# Altium PCB carrier.PcbDoc
Units mm, origin at the board's own origin, x right, y up, seen from the top; angles counter-clockwise.
Board outline 130.2 x 79.8 mm, 2 copper layers (Top Layer, Bottom Layer); 22 components, 20 nets, 149 pads, 9 vias.
Unrouted connection lines stored in the file: 1.
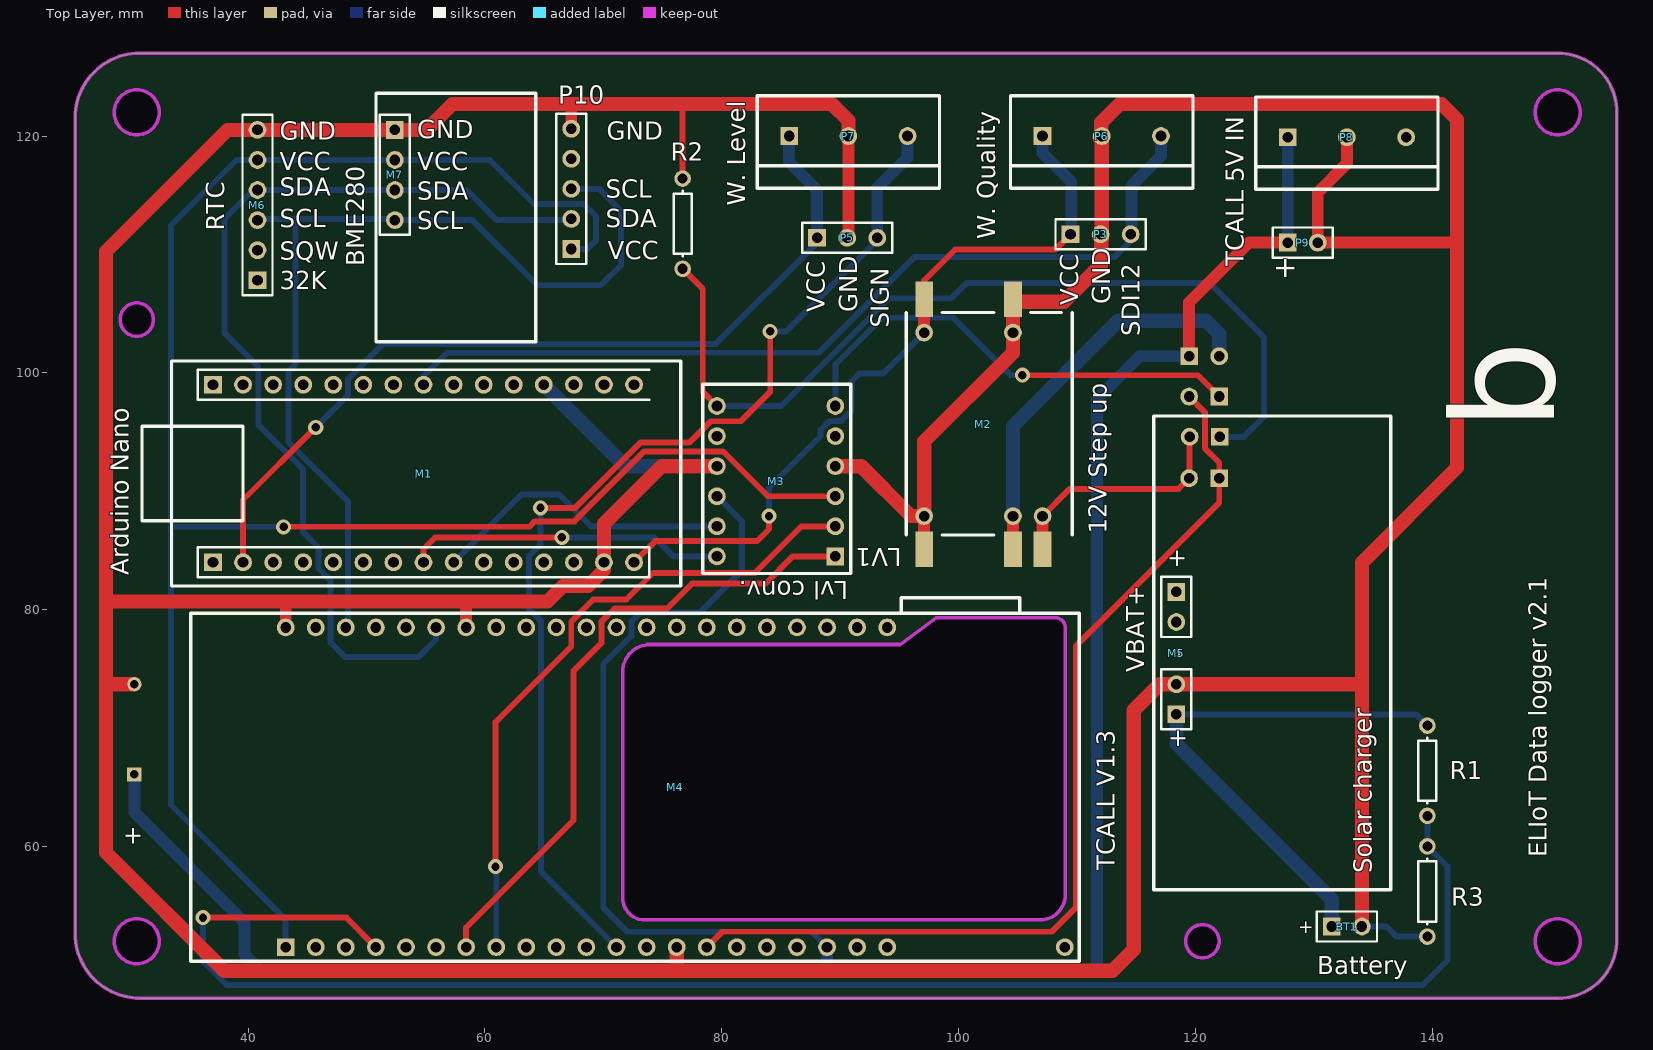
[diagram p0: Top Layer view]
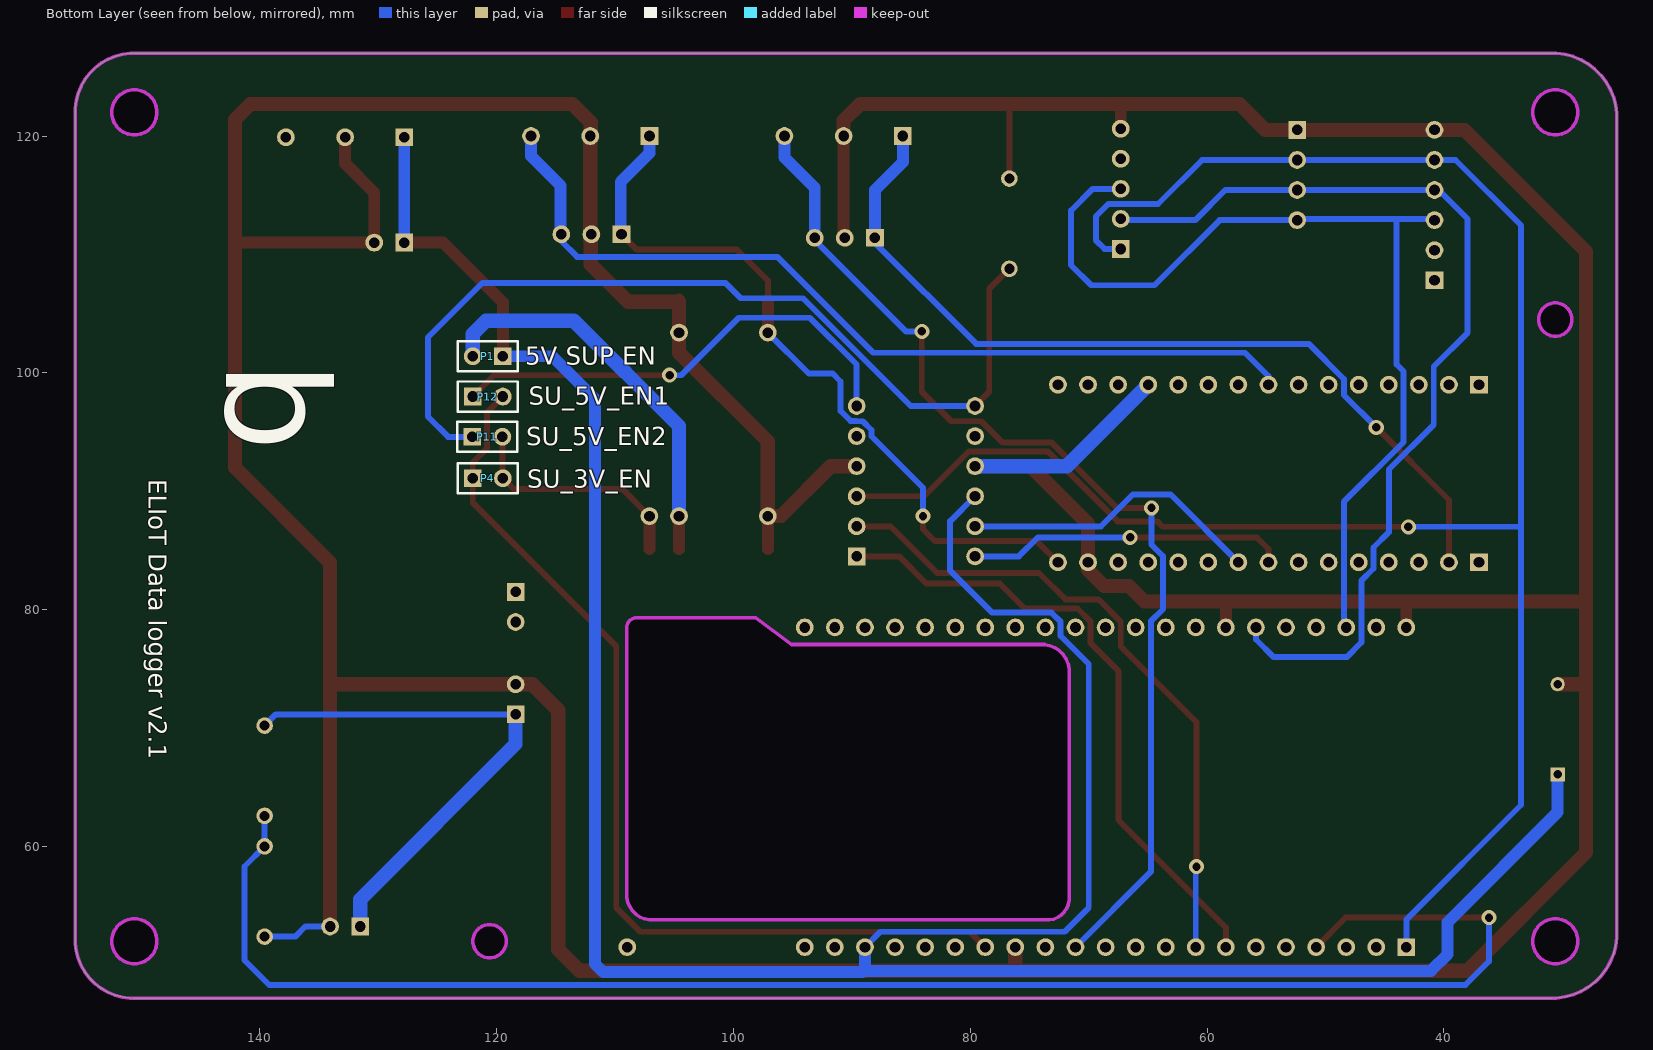
[diagram p1: Bottom Layer view, seen from below]

## Layer stack, top to bottom
Top Solder: solder mask 0.0102, Solder Resist, Dk 3.5
Top Layer: signal copper 0.0356
Dielectric 1: dielectric 0.32, FR-4, Dk 4.8
Bottom Layer: signal copper 0.0356
Bottom Solder: solder mask 0.0102, Solder Resist, Dk 3.5

## Board outline
25.4,52.658 25.4,121.537 cw(c30.863,121.537) 30.863,127 150.6,127 cw(c150.6,122) 155.6,122 155.6,52.14 cw(c150.66,52.14) 150.66,47.2 30.858,47.2 cw(c30.858,52.658)
cut-out: 119.197,52 ccw(c120.6,52) 120.6,50.597 ccw(c120.6,52) 122.003,52 ccw(c120.6,52) 120.6,53.403 ccw(c120.6,52)
cut-out: 73.5,53.8 106.9,53.8 ccw(c106.9,55.9) 109,55.9 109,78.5 ccw(c108.2,78.5) 108.2,79.3 98.104,79.3 95.097,77.057 73.957,77.057 ccw(c73.957,74.76) 71.66,74.76 71.66,55.64 ccw(c73.5,55.64)
cut-out: 30.6,103.097 cw(c30.6,104.5) 29.197,104.5 cw(c30.6,104.5) 30.6,105.903 cw(c30.6,104.5) 32.003,104.5 cw(c30.6,104.5)
cut-out: 30.6,120.1 cw(c30.6,122) 28.7,122 cw(c30.6,122) 30.6,123.9 cw(c30.6,122) 32.5,122 cw(c30.6,122)
cut-out: 28.7,52 cw(c30.6,52) 30.6,53.9 cw(c30.6,52) 32.5,52 cw(c30.6,52) 30.6,50.1 cw(c30.6,52)
cut-out: 148.7,122 ccw(c150.6,122) 150.6,120.1 ccw(c150.6,122) 152.5,122 ccw(c150.6,122) 150.6,123.9 ccw(c150.6,122)
cut-out: 148.7,52 cw(c150.6,52) 150.6,53.9 cw(c150.6,52) 152.5,52 cw(c150.6,52) 150.6,50.1 cw(c150.6,52)

## Design rules (kind name [scope] priority, off if disabled: settings)
Clearance [All] p1: gap=0.254 ignorepadtopadclearanceinfootprint=FALSE except(0: Arc-Hole Track-Hole SMDPad-Hole THPad-Hole Via-Hole Fill-Hole Poly-Hole Region-Hole Text-Hole)
PolygonConnect [All] p1: connectstyle=Relief reliefconductorwidth=0.254 reliefentries=4 polygonreliefangle="90 Angle" airgapwidth=0.254
RoutingVias [All] p1: holewidth=0.711 width=1.27 viastyle="Through Hole" minholewidth=0.711 minwidth=1.27 maxholewidth=0.711 maxwidth=1.27
SolderMaskExpansion [All] p1: expansion=0.102
Width [All] p1: maxlimit=4 minlimit=0.3 preferedwidth=1 minimp=50.000000 maximp=50.000000 favimp=50.000000
30 further rules are at their usual default settings.

## Components (designator, comment, footprint, x,y, rotation, side; value= is the part's Value field where it differs from the comment)
BT1 "Battery" BAT-2 132.8,53.243 r0 top
M1 "Arduino Nano" "ARDUINO NANO" 37.04,84 r90 top locked
M2 "Generic 3.3V - 12V Step up converter" "GENERIC 3.3 - 12V STEP UP" 96.8,87.5 r90 top locked
M3 "Generic Level Converter 4CH" "GENERIC LEVEL CONVERTER" 89.6,84.5 r180 top
M4 "TCall 1.3" "TCALL V1.3" 43.18,51.5 r90 top locked
M5 "Generic Solar Charger v1.0" "GENERIC SOLAR CHARGER" 116.4,56.36 r90 top
M6 "RTC" "GENERIC RTC MODULE" 40.8,107.82 r90 top
M7 "BME280" "SPARKFUN BME280 MODULE" 52.4,112.92 r90 top locked
P1 "5V SUP EN" HDR1X2 119.48,101.4 r0 bottom
P3 "Water Quality Header" HDR1X3 109.46,111.7 r0 top
P4 "SU_3V_EN" HDR1X2 122.02,91.1 r180 bottom
P5 "Water Level Header" HDR1X3 88.06,111.4 r0 top
P6 "Water Quality Screw Terminal" "TERMINAL BLOCK 3W 5MM" 107.1,120 r0 top
P7 "Water Level Screw Terminal" "TERMINAL BLOCK 3W 5MM" 85.7,120 r0 top
P8 "5V In" "TERMINAL BLOCK 3W 5MM" 127.8,119.9 r0 top
P9 "TCALL 5V IN" HDR1X2 127.8,111 r0 top
P10 "Header 5" HDR1X5 67.3,110.46 r90 top
P11 "SU_5V_EN2" HDR1X2 122.06,94.6 r180 bottom
P12 "SU_5V_EN1" HDR1X2 122.02,98 r180 bottom
R1 "Res1" AXIAL-0.3 139.6,66.4 r90 top value=100K
R2 "Res1" AXIAL-0.3 76.7,112.6 r270 top value=10K
R3 "Res1" AXIAL-0.3 139.6,56.2 r90 top value=100K

## Footprints (in the part's own frame and the unit in brackets; to place one, negate y for a bottom-side part, rotate by r counter-clockwise, add the part's x,y. Pads: shape width x height; smd on the part's side, far side on the other; paste and mask are expansions set on the pad)
"ARDUINO NANO" [mm]
  rect 1.5x1.5 hole 0.9: 1(0,0) 30(15,0)
  round 1.5 hole 0.9: 2(0,-2.54) 3(0,-5.08) 4(0,-7.62) 5(0,-10.16) 6(0,-12.7) 7(0,-15.24) 8(0,-17.78) 9(0,-20.32) 10(0,-22.86) 11(0,-25.4) 12(0,-27.94) 13(0,-30.48) 14(0,-33.02) 15(0,-35.56) 16(15,-35.56) 17(15,-33.02) 18(15,-30.48) 19(15,-27.94) 20(15,-25.4) 21(15,-22.86) 22(15,-20.32) 23(15,-17.78) 24(15,-15.24) 25(15,-12.7) 26(15,-10.16) 27(15,-7.62) 28(15,-5.08) 29(15,-2.54)
  silkscreen extent -2,-39.5 17,6
AXIAL-0.3 [mm] "Axial Device, Thru-Hole; 2 Leads; 0.3 in Pin Spacing"
  round 1.4 hole 0.85: 1(-3.81,0) 2(3.81,0)
  silkscreen extent -2.77,-0.76 2.77,0.76
BAT-2 [mm] "Battery; 2 Leads"
  rect 1.5x1.5 hole 0.9: 1(-1.27,0)
  round 1.5 hole 0.9: 2(1.27,0)
  silkscreen extent -2.54,-1.27 2.54,1.27
"GENERIC 3.3 - 12V STEP UP" [mm]
  rect 3x1.5 smd: 1(-2.4,-0.3) 2(-2.4,-7.8) 3(-2.4,-10.3) 4(18.7,-7.8) 5(18.7,-0.3)
  round 1.5 hole 0.9: 1(0.4,-0.3) 2(0.4,-7.8) 3(0.4,-10.3) 4(15.9,-7.8) 5(15.9,-0.3)
  Top Layer lines w1: -2.4,-0.3 0.4,-0.3 ; 15.9,-0.3 18.5,-0.3 18.7,-0.3 ; -2.4,-7.8 0.4,-7.8 ; 15.9,-7.8 18.5,-7.8 18.7,-7.8 ; -2.4,-10.3 0.4,-10.3
  silkscreen extent -1.2,-12.8 17.6,1.2
"GENERIC LEVEL CONVERTER" [mm]
  rect 1.5x1.5 hole 0.9: 1(0,0)
  round 1.5 hole 0.9: 2(0,-2.54) 3(0,-5.08) 4(0,-7.62) 5(0,-10.16) 6(0,-12.7) 7(10,-12.7) 8(10,-10.16) 9(10,-7.62) 10(10,-5.08) 11(10,-2.54) 12(10,0)
  silkscreen extent -1.3,-14.55 11.2,1.45
"GENERIC RTC MODULE" [mm]
  rect 1.5x1.5 hole 0.9: 1(0,0)
  round 1.5 hole 0.9: 2(2.54,0) 3(5.08,0) 4(7.62,0) 5(10.16,0) 6(12.7,0)
  silkscreen extent -1.27,-1.27 13.97,1.27
"GENERIC SOLAR CHARGER" [mm]
  rect 1.5x1.5 hole 0.9: 1(14.8,-2) 4(25.14,-2)
  round 1.5 hole 0.9: 2(17.34,-2) 3(22.6,-2)
  silkscreen extent 0,-20.1 40,-0.1
HDR1X2 [mm] "Connector; Header; 2 Position"
  rect 1.5x1.5 hole 0.9: 1(0,0)
  round 1.5 hole 0.9: 2(2.54,0)
  silkscreen extent -1.27,-1.27 3.81,1.27
HDR1X3 [mm]
  rect 1.5x1.5 hole 0.9: 1(0,0)
  round 1.5 hole 0.9: 2(2.54,0) 3(5.08,0)
  silkscreen extent -1.27,-1.27 6.35,1.27
HDR1X5 [mm] "Connector; Header; 5 Position"
  rect 1.5x1.5 hole 0.9: 1(0,0)
  round 1.5 hole 0.9: 2(2.54,0) 3(5.08,0) 4(7.62,0) 5(10.16,0)
  silkscreen extent -1.27,-1.27 11.43,1.27
"SPARKFUN BME280 MODULE" [mm]
  rect 1.5x1.5 hole 0.9: 1(7.6,0)
  round 1.5 hole 0.9: 2(5.06,0) 3(2.52,0) 4(-0.02,0)
  silkscreen extent -10.3,-11.9 10.7,1.6
"TCALL V1.3" [mm]
  rect 1.5x1.5 hole 0.9: 1(0,0)
  round 1.5 hole 0.9: 2(0,-2.54) 3(0,-5.08) 4(0,-7.62) 5(0,-10.16) 6(0,-12.7) 7(0,-15.24) 8(0,-17.78) 9(0,-20.32) 10(0,-22.86) 11(0,-25.4) 12(0,-27.94) 13(0,-30.48) 14(0,-33.02) 15(0,-35.56) 16(0,-38.1) 17(0,-40.64) 18(0,-43.18) 19(0,-45.72) 20(0,-48.26) 21(0,-50.8) 22(27,-50.8) 23(27,-48.26) 24(27,-45.72) 25(27,-43.18) 26(27,-40.64) 27(27,-38.1) 28(27,-35.56) 29(27,-33.02) 30(27,-30.48) 31(27,-27.94) 32(27,-25.4) 33(27,-22.86) 34(27,-20.32) 35(27,-17.78) 36(27,-15.24) 37(27,-12.7) 38(27,-10.16) 39(27,-7.62) 40(27,-5.08) 41(27,-2.54) 42(27,0) VBAT(0,-65.8)
  silkscreen extent -1.2,-67 29.5,8
"TERMINAL BLOCK 3W 5MM" [mm]
  rect 1.5x1.5 hole 0.9: 1(0,0)
  round 1.5 hole 0.9: 2(5,0) 3(10,0)
  silkscreen extent -2.7,-4.4 12.7,3.4

## Part data
BT1: "Multicell Battery", LatestRevisionDate=17-Jul-2002, LatestRevisionNote="Re-released for DXP Platform.", PackageDescription="Battery; 2 Leads", PackageReference=BAT-2, Published=24-Mar-1999, Publisher="Altium Limited"
M6: library part "Generic RTC Module"
M7: library part "Sparkfun BME280 Module"
P1 P4 P9 P11 P12: library part "Header 2", "Header, 2-Pin", LatestRevisionDate=17-Jul-2002, LatestRevisionNote="Re-released for DXP Platform.", Publisher="Altium Limited"
P3: library part "Header 3", "Water Ql.", LatestRevisionDate=17-Jul-2002, LatestRevisionNote="Re-released for DXP Platform.", Publisher="Altium Limited"
P5 P6 P7 P8: library part "Header 3", "Header, 3-Pin", LatestRevisionDate=17-Jul-2002, LatestRevisionNote="Re-released for DXP Platform.", Publisher="Altium Limited"
P10: "Header, 5-Pin", LatestRevisionDate=17-Jul-2002, LatestRevisionNote="Re-released for DXP Platform.", Publisher="Altium Limited"
R1 R2 R3: "Resistor", LatestRevisionDate=17-Jul-2002, LatestRevisionNote="Re-released for DXP Platform.", PackageDescription="Axial Device, Thru-Hole; 2 Leads; 0.3 in Pin Spacing", PackageReference=AXIAL-0.3, Published=8-Jun-2000, Publisher="Altium Limited"

## Free pads (board coordinates)
  rect 1.2x1.2 hole 0.7: 1(30.4,66.09)
  round 1.2 hole 0.7: 2(30.4,73.71)

## Via types
v1: diameter 1.27, hole 0.711, Top Layer to Bottom Layer, 9 vias

## Nets (pads, with @x,y where several pads share a name; then routed paths per layer and width w, separated by ;. In a path a pad name is that pad's centre, name@x,y a point inside that pad or via, vN(x,y) a via of type N, cw(c..) or ccw(c..) an arc to the next point about the centre after c; other vN are vias at no path point)
GND: BT1.2 M1.14 M1.19 M2.1 M2.4 M3.4 M3.9 M4.14 M4.36 M4.42 M5.2 M6.6 M7.1 P3.2 P5.2 P6.2 P7.2 P8.2 P9.2 P10.5 pad.2 R2.1 R3.1 | length 536.3
  Top Layer w0.5: R2.1 76.7,122.7 ; 134.07,74.4 134.2,74.27
  Top Layer w1: M4.42 43.18,80.67 43.21,80.7 ; M4.36 58.42,80.7 ; P10.5@67.1,120.58 67.3,120.78 67.3,122.7 ; P5.2 90.7,111.5 P7.2@90.7,119.9 ; P7.2@90.7,120.3 90.8,120.2 P7.2@90.8,119.9 ; P8.2 132.8,117.68 130.34,115.22 P9.2 142.1,111
  Top Layer w1.2: 28,96.6 28,80.7 ; 28,96.7 28,110.245 38.275,120.52 M6.6 55.1,120.52 57.28,122.7 67.3,122.7 76.7,122.7 89.3,122.7 90.7,121.3 P7.2@90.7,120.3 ; pad.2 28.01,73.71 28,73.7 ; M4.14 76.2,49.6 76.1,49.5 ; M3.9 74.92,92.12 70.06,87.26 70.06,83.36 68.7,82 66.6,82 65.3,80.7 58.42,80.7 43.21,80.7 28,80.7 ; M3.4 91.78,92.12 96,87.9 97.1,87.9 97.1,94.206 104.6,101.706 104.6,103.4 104.6,106 108.9,106 112.06,109.16 112.06,111.2 112.1,111.24 P6.2@112.1,119.9 ; P6.2@111.9,119.9 112.06,120.06 112.06,121.14 113.62,122.7 140.8,122.7 142.1,121.4 142.1,111 142.1,92 134.07,83.97 134.07,74.4 134.07,73.7 ; BT1.2 134.07,73.7 ; 28,73.7 28,80.7 ; 28,73.7 28,59.5 38,49.5 76.1,49.5 ; 76.1,49.5 113,49.5 114.8,51.3 114.8,71.5 117,73.7 M5.2 134.07,73.7
  Bottom Layer w0.5: BT1.2 136.157,53.243 137.01,52.39 R3.1
  Bottom Layer w1.2: M1.19 71.86,92.12 M3.9
"MAIN I2C SCL": M4.40 M6.3 M7.4 P10.3 | length 80.2
  Bottom Layer w0.5: M6.3 40.9,113 44,113 ; M4.40 48.454,78.694 48.454,89.106 43.406,94.154 43.406,100.113 44,100.707 44,113 ; P10.3 69.66,115.54 71.5,113.7 71.5,109.1 69.8,107.4 64.44,107.4 58.94,112.9 M7.4 52.3,113 44,113
"MAIN I2C SDA": M4.37 M6.4 M7.3 P10.2 | length 81.9
  Bottom Layer w0.5: M4.37 55.88,77.48 54.388,75.988 48.212,75.988 46.974,77.226 46.974,82.453 45.946,83.481 45.946,85.254 44.66,86.54 44.66,91.834 40.866,95.628 40.866,100.534 38,103.4 38,113 40.44,115.44 M6.4 58.46,115.44 61,112.9 P10.2@67.3,112.9
NetBT1_1: BT1.1 M4.VBAT M5.1 R1.2 | length 44.9
  Bottom Layer w0.5: M5.1 138.65,71.16 R1.2
  Bottom Layer w1.2: M5.1 118.4,68.651 131.53,55.521 BT1.1
NetM1_2: M1.2 P5.1 P7.1 | length 73
  Top Layer w0.5: M1.2 39.58,89.26 v1(45.72,95.4)
  Bottom Layer w0.5: v1(45.72,95.4) 48.454,98.134 48.454,99.487 51.421,102.454 79.514,102.454 P5.1@88.06,111
  Bottom Layer w1: P7.1@85.7,119.9 85.7,117.8 88.06,115.44 P5.1
NetM1_8: M1.8 M3.12 | length 27
  Top Layer w0.5: M1.8 54.82,85.12 55.8,86.1 v1(66.5,86.1)
  Bottom Layer w0.5: v1(66.5,86.1) 74.3,86.1 75.9,84.5 M3.12
NetM1_9: M1.9 M3.11 | length 25.7
  Bottom Layer w0.5: M1.9 63.099,89.739 66.261,89.739 68.96,87.04 M3.11
NetM1_15: M1.15 M2.5 P3.1 P6.1 | length 63.9
  Top Layer w0.5: M1.15 74.386,85.786 82.986,85.786 84,86.8 v1(84,87.9) ; M2.5@97.1,103.4 97.1,106 97.1,106.2 97.1,107.8 99.7,110.4 108.16,110.4 108.96,111.2 P3.1@109.52,111.2
  Bottom Layer w0.5: v1(84,87.9) 84,90.3 88.346,94.646 88.346,95.179 89.081,95.914 89.614,95.914 89.646,95.946 90.119,95.946 90.961,96.788 90.961,99.272 91.628,99.939 93.639,99.939 M2.5@97.1,103.4
  Bottom Layer w1: P6.1@107.1,119.9 107.1,118.54 109.52,116.12 P3.1@109.52,111.6
NetM1_23: M1.23 P3.3 P6.3 | length 75
  Bottom Layer w0.5: M1.23 54.82,99.72 56.8,101.7 88.2,101.7 96.3,109.8 113.2,109.8 114.54,111.14 P3.3@114.54,111.6
  Bottom Layer w1: P3.3@114.54,111.6 114.6,111.66 114.6,115.8 117.1,118.3 P6.3@117.1,119.9
NetM2_3: M2.3 P4.2 P11.2 | length 17.2
  Top Layer w0.5: M2.3@107.1,87.9 109.4,90.2 118.58,90.2 P4.2 119.52,91.14 P11.2
NetM3_1: M3.1 M4.7 | length 54.3
  Top Layer w0.5: M4.7 58.42,53.163 67.5,62.243 67.5,74.834 69.866,77.2 69.866,79.019 70.947,80.1 75.4,80.1 77.5,82.2 83.7,82.2 86,84.5 M3.1
NetM3_2: M3.2 M4.8 | length 55.8
  Top Layer w0.5: v1(60.9,58.3) 60.9,70.5 67.294,76.894 67.294,78.987 69.161,80.854 71.954,80.854 74.2,83.1 82.8,83.1 86.74,87.04 M3.2
  Bottom Layer w0.5: v1(60.9,58.3) 60.96,58.24 M4.8
NetM3_6: M3.6 P12.1 | length 40.3
  Top Layer w0.5: v1(105.4,99.8) 120.22,99.8 P12.1
  Bottom Layer w0.5: M3.6 89.6,100.7 93.554,104.654 99.546,104.654 104.4,99.8 v1(105.4,99.8)
NetM3_7: M3.7 P11.1 R2.2 | length 76.3
  Top Layer w0.5: R2.2 78.4,107.09 78.4,98.4 M3.7
  Bottom Layer w0.5: M3.7 85.034,97.2 94.134,106.3 99.4,106.3 100.7,107.6 121.2,107.6 125.8,103 125.8,96.3 124.1,94.6 P11.1
NetM4_4: M4.4 R1.1 R3.2 | length 139
  Top Layer w0.5: v1(36.2,54) 48.3,54 M4.4
  Bottom Layer w0.5: v1(36.2,54) 36.2,50.3 38.2,48.3 139.2,48.3 141.3,50.4 141.3,58.31 R3.2 R1.1
NetM4_12: M4.12 P5.3 P7.3 | length 90.8
  Top Layer w0.5: v1(64.7,88.6) 67.634,88.6 73.162,94.128 77.295,94.128 79.081,95.914 81.614,95.914 84.1,98.4 v1(84.1,103.5)
  Bottom Layer w0.5: v1(64.7,88.6) 64.7,85.493 63.726,84.519 63.726,80.047 64.754,79.019 64.754,57.866 M4.12 ; v1(84.1,103.5) 85.44,103.5 P5.3@92.94,111
  Bottom Layer w1: P5.3@93.14,111.2 P5.3 93.14,115.64 95.7,118.2 P7.3@95.7,119.9
NetM4_15: M4.15 P4.1 P12.2 | length 81.8
  Top Layer w0.5: M4.15 80.04,52.8 107.866,52.8 109.9,54.834 109.9,76.9 122.02,89.02 P4.1 122.02,92.427 120.806,93.641 120.806,96.674 P12.2
TANTALUM_4V: M2.2 P1.2 | length 31.1
  Bottom Layer w1.2: M2.2@104.6,87.9 104.6,95.5 113.5,104.4 120.9,104.4 122.02,103.28 P1.2
"TCALL 3.3V": M3.3 M4.1 M6.5 M7.2 P10.1 | length 169.9
  Top Layer w0.5: v1(43,87) 63.767,87 64.228,87.461 67.561,87.461 73.474,93.374 80.119,93.374 83.913,89.58 M3.3
  Bottom Layer w0.5: v1(43,87) 33.7,87 33.5,86.8 ; M4.1 43.18,53.82 33.5,63.5 33.5,86.8 ; P10.1 68.66,110.46 69.4,111.2 69.4,113.2 68.346,114.254 64.146,114.254 60.42,117.98 M7.2 39.02,117.98 33.5,112.46 33.5,86.8
"TCALL 5V": M3.10 M4.19 P1.1 P8.1 P9.1 pad.1 | length 238.4
  Top Layer w1: P1.1 119.48,105.96 124.52,111 P9.1
  Bottom Layer w0.5: M3.10 81.7,87.48 81.7,83.3 78.154,79.754 73.141,79.754 72.374,78.987 72.374,77.783 70,75.409 70,54.839 72.039,52.8 87.6,52.8 M4.19
  Bottom Layer w1: pad.1@30.413,66 30.413,62.887 39.7,53.6 39.7,50.9 41.1,49.5 89,49.5 ; M4.19 88.9,49.6 89,49.5 ; P1.1 115.3,101.4 111.7,97.8 111.7,57.7 111.7,50.1 111,49.4 89.1,49.4 89,49.5 ; P9.1 P8.1
pads on no net: M1.1 M1.3 M1.4 M1.5 M1.6 M1.7 M1.10 M1.11 M1.12 M1.13 M1.16 M1.17 M1.18 M1.20 M1.21 M1.22 M1.24 M1.25 M1.26 M1.27 M1.28 M1.29 M1.30 M3.5 M3.8 M4.2 M4.3 M4.5 M4.6 M4.9 M4.10 M4.11 M4.13 M4.16 M4.17 M4.18 M4.20 M4.21 M4.22 M4.23 M4.24 M4.25 M4.26 M4.27 M4.28 M4.29 M4.30 M4.31 M4.32 M4.33 M4.34 M4.35 M4.38 M4.39 M4.41 M5.3 M5.4 M6.1 M6.2 P8.3 P10.4

## Keep-outs
Keep-Out Layer:
  lines w0.3: 71.66,74.76 71.66,55.64 71.66,55.459 71.731,55.103 71.869,54.768 72.071,54.467 72.327,54.211 72.628,54.009 72.963,53.871 73.319,53.8 73.5,53.8 ; 71.66,74.76 71.66,74.986 71.748,75.43 71.921,75.848 72.173,76.224 72.493,76.544 72.869,76.796 73.287,76.969 73.731,77.057 73.957,77.057 95.097,77.057 98.104,79.3 108.2,79.3 ; 71.66,74.76 71.66,74.76 ; 71.66,74.76 71.66,74.76 ; 73.5,53.8 106.9,53.8 107.107,53.8 107.513,53.881 107.895,54.039 108.239,54.269 108.531,54.561 108.761,54.905 108.919,55.287 109,55.693 109,55.9 ; 73.5,53.8 73.5,53.8 ; 108.2,79.3 108.2,79.3 ; 108.2,79.3 108.279,79.3 108.433,79.269 108.579,79.209 108.71,79.121 108.821,79.01 108.909,78.879 108.969,78.733 109,78.579 109,78.5 109,55.9 ; 109,55.9 109,55.9 ; 25.4,52.301 25.4,52.658 25.4,121.537 25.4,121.895 25.493,122.605 25.679,123.297 25.953,123.959 26.311,124.579 26.747,125.147 27.253,125.653 27.821,126.089 28.441,126.447 29.103,126.721 29.795,126.907 30.505,127 150.928,127 151.578,126.914 152.211,126.745 152.816,126.494 153.384,126.166 153.904,125.767 154.367,125.304 154.766,124.784 155.094,124.216 155.345,123.611 155.514,122.978 155.6,122.328 155.6,122 155.6,52.14 155.6,51.816 155.515,51.174 155.348,50.548 155.1,49.95 154.776,49.389 154.382,48.876 153.924,48.418 153.411,48.024 152.85,47.7 152.252,47.452 151.626,47.285 150.984,47.2 30.501,47.2 29.791,47.293 29.1,47.479 28.439,47.752 27.819,48.11 27.252,48.546 26.746,49.052 26.31,49.619 25.952,50.239 25.679,50.9 25.493,51.591 25.4,52.301 ; 28.7,51.813 28.773,51.446 28.916,51.1 29.124,50.789 29.389,50.524 29.7,50.316 30.046,50.173 30.413,50.1 30.787,50.1 31.154,50.173 31.5,50.316 31.811,50.524 32.076,50.789 32.284,51.1 32.427,51.446 32.5,51.813 32.5,52 32.5,52.187 32.427,52.554 32.284,52.9 32.076,53.211 31.811,53.476 31.5,53.684 31.154,53.827 30.787,53.9 30.413,53.9 30.046,53.827 29.7,53.684 29.389,53.476 29.124,53.211 28.916,52.9 28.773,52.554 28.7,52.187 28.7,52 28.7,51.813 ; 28.7,121.813 28.773,121.446 28.916,121.1 29.124,120.789 29.389,120.524 29.7,120.316 30.046,120.173 30.413,120.1 30.787,120.1 31.154,120.173 31.5,120.316 31.811,120.524 32.076,120.789 32.284,121.1 32.427,121.446 32.5,121.813 32.5,122 32.5,122.187 32.427,122.554 32.284,122.9 32.076,123.211 31.811,123.476 31.5,123.684 31.154,123.827 30.787,123.9 30.413,123.9 30.046,123.827 29.7,123.684 29.389,123.476 29.124,123.211 28.916,122.9 28.773,122.554 28.7,122.187 28.7,122 28.7,121.813 ; 29.197,104.362 29.251,104.091 29.357,103.835 29.51,103.606 29.706,103.41 29.935,103.257 30.191,103.151 30.462,103.097 30.738,103.097 31.009,103.151 31.265,103.257 31.494,103.41 31.69,103.606 31.843,103.835 31.949,104.091 32.003,104.362 32.003,104.5 32.003,104.638 31.949,104.909 31.843,105.165 31.69,105.394 31.494,105.59 31.265,105.743 31.009,105.849 30.738,105.903 30.462,105.903 30.191,105.849 29.935,105.743 29.706,105.59 29.51,105.394 29.357,105.165 29.251,104.909 29.197,104.638 29.197,104.5 29.197,104.362 ; 119.197,51.862 119.251,51.591 119.357,51.335 119.51,51.106 119.706,50.91 119.935,50.757 120.191,50.651 120.462,50.597 120.738,50.597 121.009,50.651 121.265,50.757 121.494,50.91 121.69,51.106 121.843,51.335 121.949,51.591 122.003,51.862 122.003,52 122.003,52.138 121.949,52.409 121.843,52.665 121.69,52.894 121.494,53.09 121.265,53.243 121.009,53.349 120.738,53.403 120.462,53.403 120.191,53.349 119.935,53.243 119.706,53.09 119.51,52.894 119.357,52.665 119.251,52.409 119.197,52.138 119.197,52 119.197,51.862 ; 148.7,51.813 148.773,51.446 148.916,51.1 149.124,50.789 149.389,50.524 149.7,50.316 150.046,50.173 150.413,50.1 150.787,50.1 151.154,50.173 151.5,50.316 151.811,50.524 152.076,50.789 152.284,51.1 152.427,51.446 152.5,51.813 152.5,52 152.5,52.187 152.427,52.554 152.284,52.9 152.076,53.211 151.811,53.476 151.5,53.684 151.154,53.827 150.787,53.9 150.413,53.9 150.046,53.827 149.7,53.684 149.389,53.476 149.124,53.211 148.916,52.9 148.773,52.554 148.7,52.187 148.7,52 148.7,51.813 ; 148.7,121.813 148.773,121.446 148.916,121.1 149.124,120.789 149.389,120.524 149.7,120.316 150.046,120.173 150.413,120.1 150.787,120.1 151.154,120.173 151.5,120.316 151.811,120.524 152.076,120.789 152.284,121.1 152.427,121.446 152.5,121.813 152.5,122 152.5,122.187 152.427,122.554 152.284,122.9 152.076,123.211 151.811,123.476 151.5,123.684 151.154,123.827 150.787,123.9 150.413,123.9 150.046,123.827 149.7,123.684 149.389,123.476 149.124,123.211 148.916,122.9 148.773,122.554 148.7,122.187 148.7,122 148.7,121.813

## Other copper
Bottom Layer:
  pour cut-out: 148.7,52 cw(c150.6,52) 150.6,53.9 cw(c150.6,52) 152.5,52 cw(c150.6,52) 150.6,50.1 cw(c150.6,52)
  pour cut-out: 28.7,52 cw(c30.6,52) 30.6,53.9 cw(c30.6,52) 32.5,52 cw(c30.6,52) 30.6,50.1 cw(c30.6,52)

## Silkscreen, mask and mechanical layers (free items; w line width, h text height)
Top Overlay:
  text "GND" at 70.3,119.7 h1.52
  text "GND" at 42.7,119.676 h1.52
  text "VCC" at 42.7,117.1 h1.52
  text "SDA" at 42.7,114.96 h1.52
  text "SCL" at 70.2,114.8 h1.52
  text "W. Level" at 82,114.1 h1.52 r90
  text "SCL" at 42.7,112.3 h1.52
  text "SDA" at 70.2,112.3 h1.52
  text "W. Quality" at 103.1,111.3 h1.52 r90
  text "VCC" at 70.4,109.6 h1.52
  text "SQW" at 42.7,109.54 h1.52
  text "+" at 129,107.82 h3 r90
  text "32K" at 42.7,107.04 h1.52
  text "GND" at 112.8,105.8 h1.52 r90
  text "VCC" at 110.1,105.7 h1.52 r90
  text "VCC" at 88.7,105.1 h1.52 r90
  text "GND" at 91.44,105.1 h1.52 r90
  text "SIGN" at 94.1,103.8 h1.52 r90
  text "SDI12" at 115.3,103.1 h1.52 r90
  text "b" at 153.2,95.1 h15 r90
  text "VBAT+" at 115.7,74.7 h1.52 r90
  text "+" at 29.663,61.768 h1.5 r270
  text "ELIoT Data logger v2.1" at 149.7,59.1 h1.52 r90
Bottom Overlay:
  text "b" at 145.7,101 h15 r90
  text "ELIoT Data logger v2.1" at 149.389,91 h1.52 r90
Mechanical 1:
  circle w0.254: c30.6,122 r1.9
  circle w0.254: c120.6,52 r1.403
  circle w0.254: c150.6,122 r1.9
  circle w0.254: c150.6,52 r1.9
  circle w0.254: c30.6,104.5 r1.403
  circle w0.254: c30.6,52 r1.9
  lines w0.279: 71.66,71.6 ccw(c71.66,71.6) 71.66,71.6 ; 71.66,71.6 71.66,74.76 cw(c73.957,74.76) 73.957,77.057 79.157,77.057 89.659,77.057 95.097,77.057 98.104,79.3 108.209,79.3 cw(c108.209,78.509) 109,78.509 109,55.9 cw(c106.9,55.9) 106.9,53.8 73.478,53.8 cw(c73.478,55.618) 71.66,55.618 71.66,57.3 71.66,71.6
  lines w0.3: 25.4,52.658 ccw(c30.858,52.658) 30.858,47.2 37.4,47.2 147.8,47.2 150.66,47.2 ccw(c150.66,52.14) 155.6,52.14 155.6,55.6 155.6,120 155.6,122 ccw(c150.6,122) 150.6,127 143.7,127 35.9,127 30.863,127 ccw(c30.863,121.537) 25.4,121.537 25.4,116.1 25.4,57.9 25.4,52.658

## Text inside footprints (layer, text, board x,y; h text height)
BT1: Top Overlay "+" at 128.7,52.665 h1.15
M2: Top Overlay "12V Step up" at 112.5,86.4 h1.52 r90
M3: Top Overlay "LV1" at 95.2,85.2 h1.52 r180; Top Overlay "Lvl conv." at 90.7,82.4 h1.52 r180
M4: Top Overlay "TCALL V1.3" at 113.18,58 h1.52 r90
M5: Top Overlay "Solar charger" at 134.9,57.76 h1.52 r90; Top Overlay "+" at 119.1,83.46 h1.52 r90; Top Overlay "-" at 119.2,75.86 h1.52 r90; Top Overlay "+" at 119.2,68.26 h1.52 r90
M7: Top Overlay "GND" at 54.3,119.8 h1.52; Top Overlay "VCC" at 54.3,117.12 h1.52; Top Overlay "SDA" at 54.3,114.62 h1.52; Top Overlay "SCL" at 54.3,112.12 h1.52